# Altium PCB G5_Adapted.PcbDoc (part 1 of 2)
Units mil, origin at the board's own origin, x right, y up, seen from the top; angles counter-clockwise.
Board outline 3665.01 x 3900.74 mil, 4 copper layers (Top Layer, Int1, Int2, Bottom Layer), stack 53.912 mil thick; 133 components, 90 nets, 479 pads, 177 vias.
Unrouted connection lines stored in the file: 1.
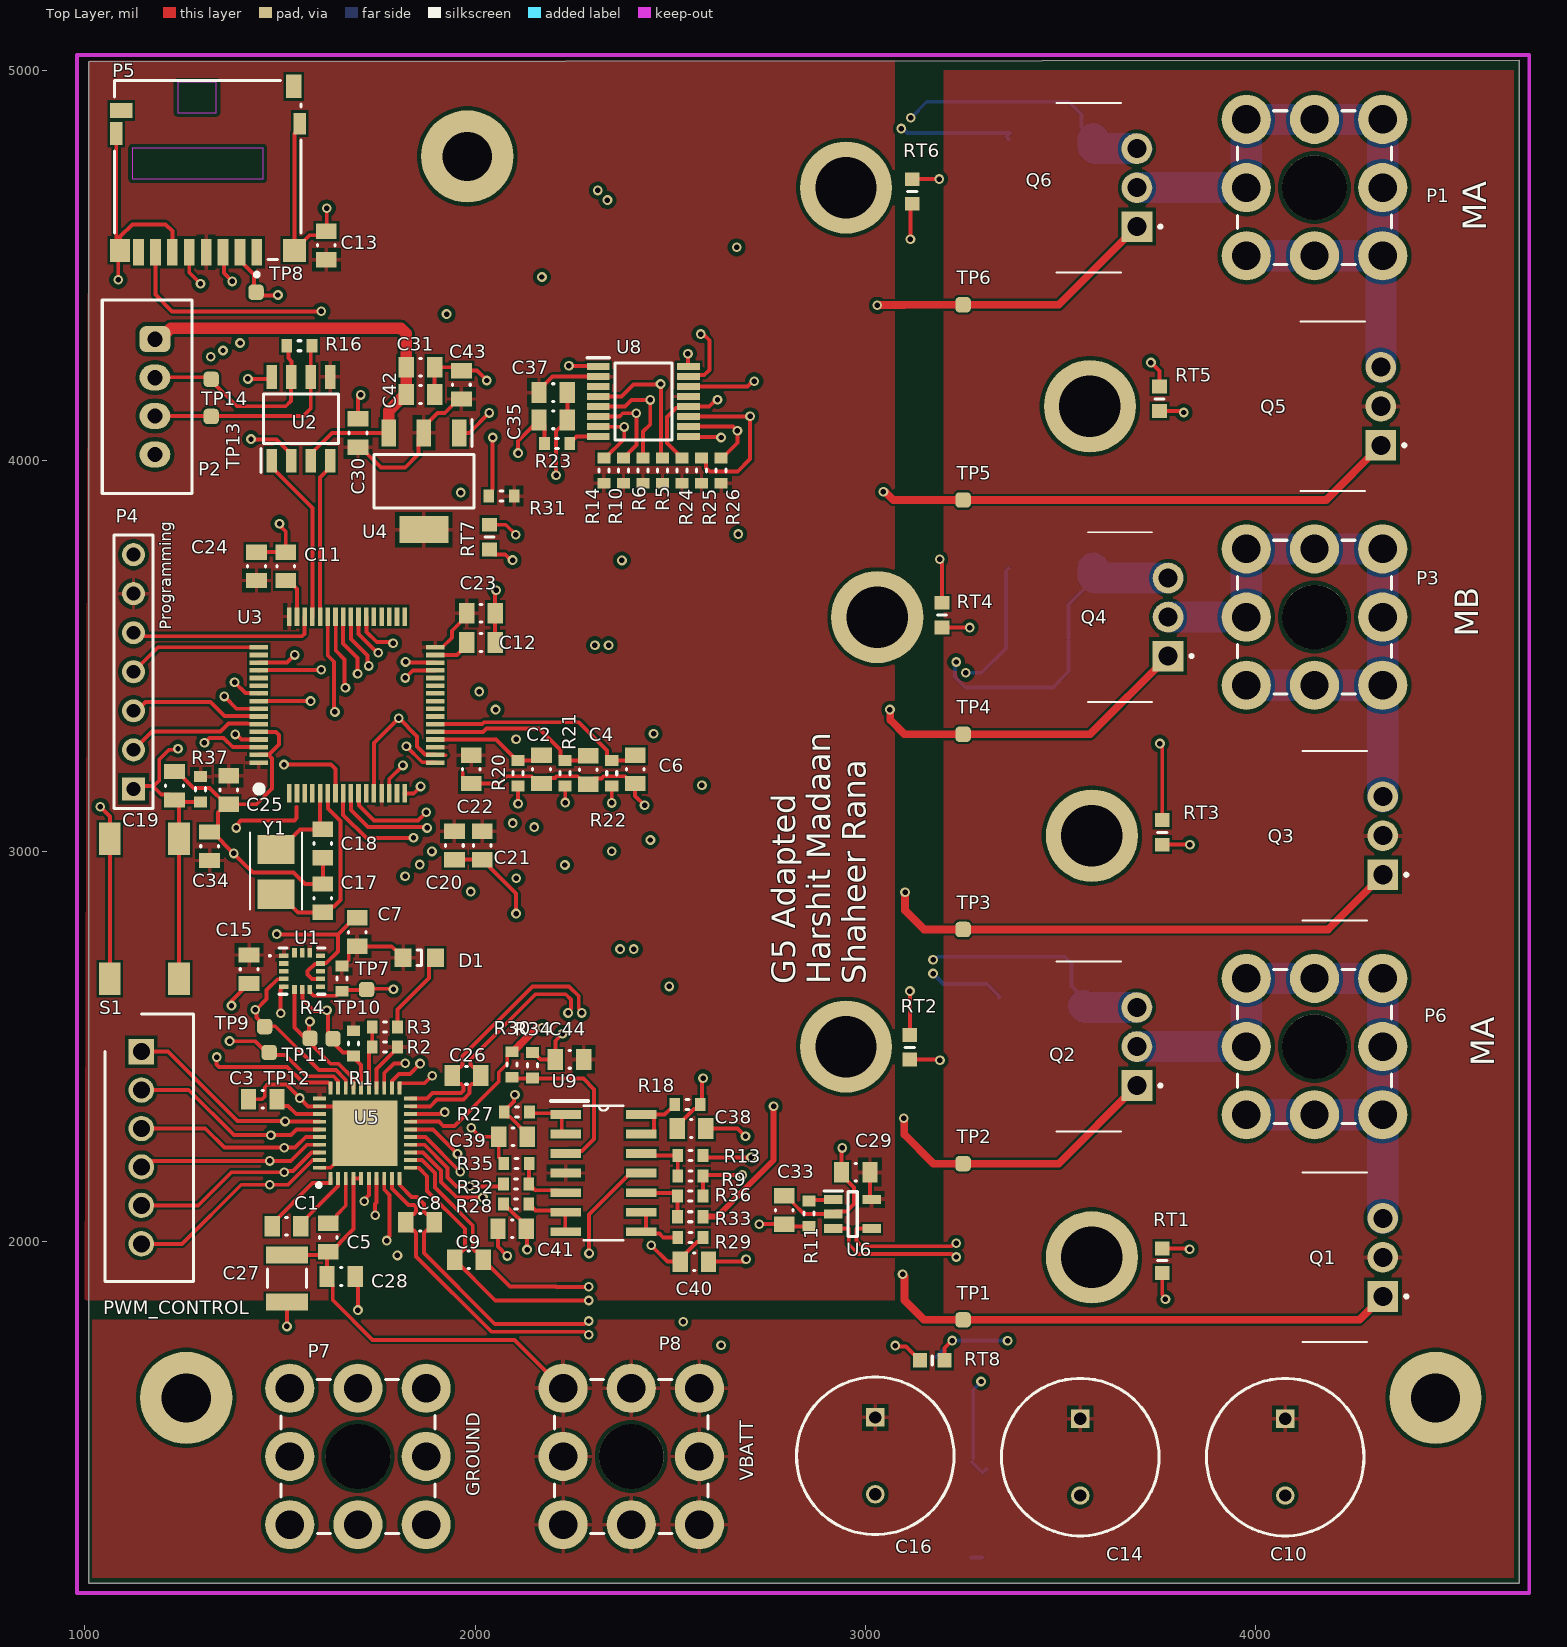
[diagram p0: Top Layer view]
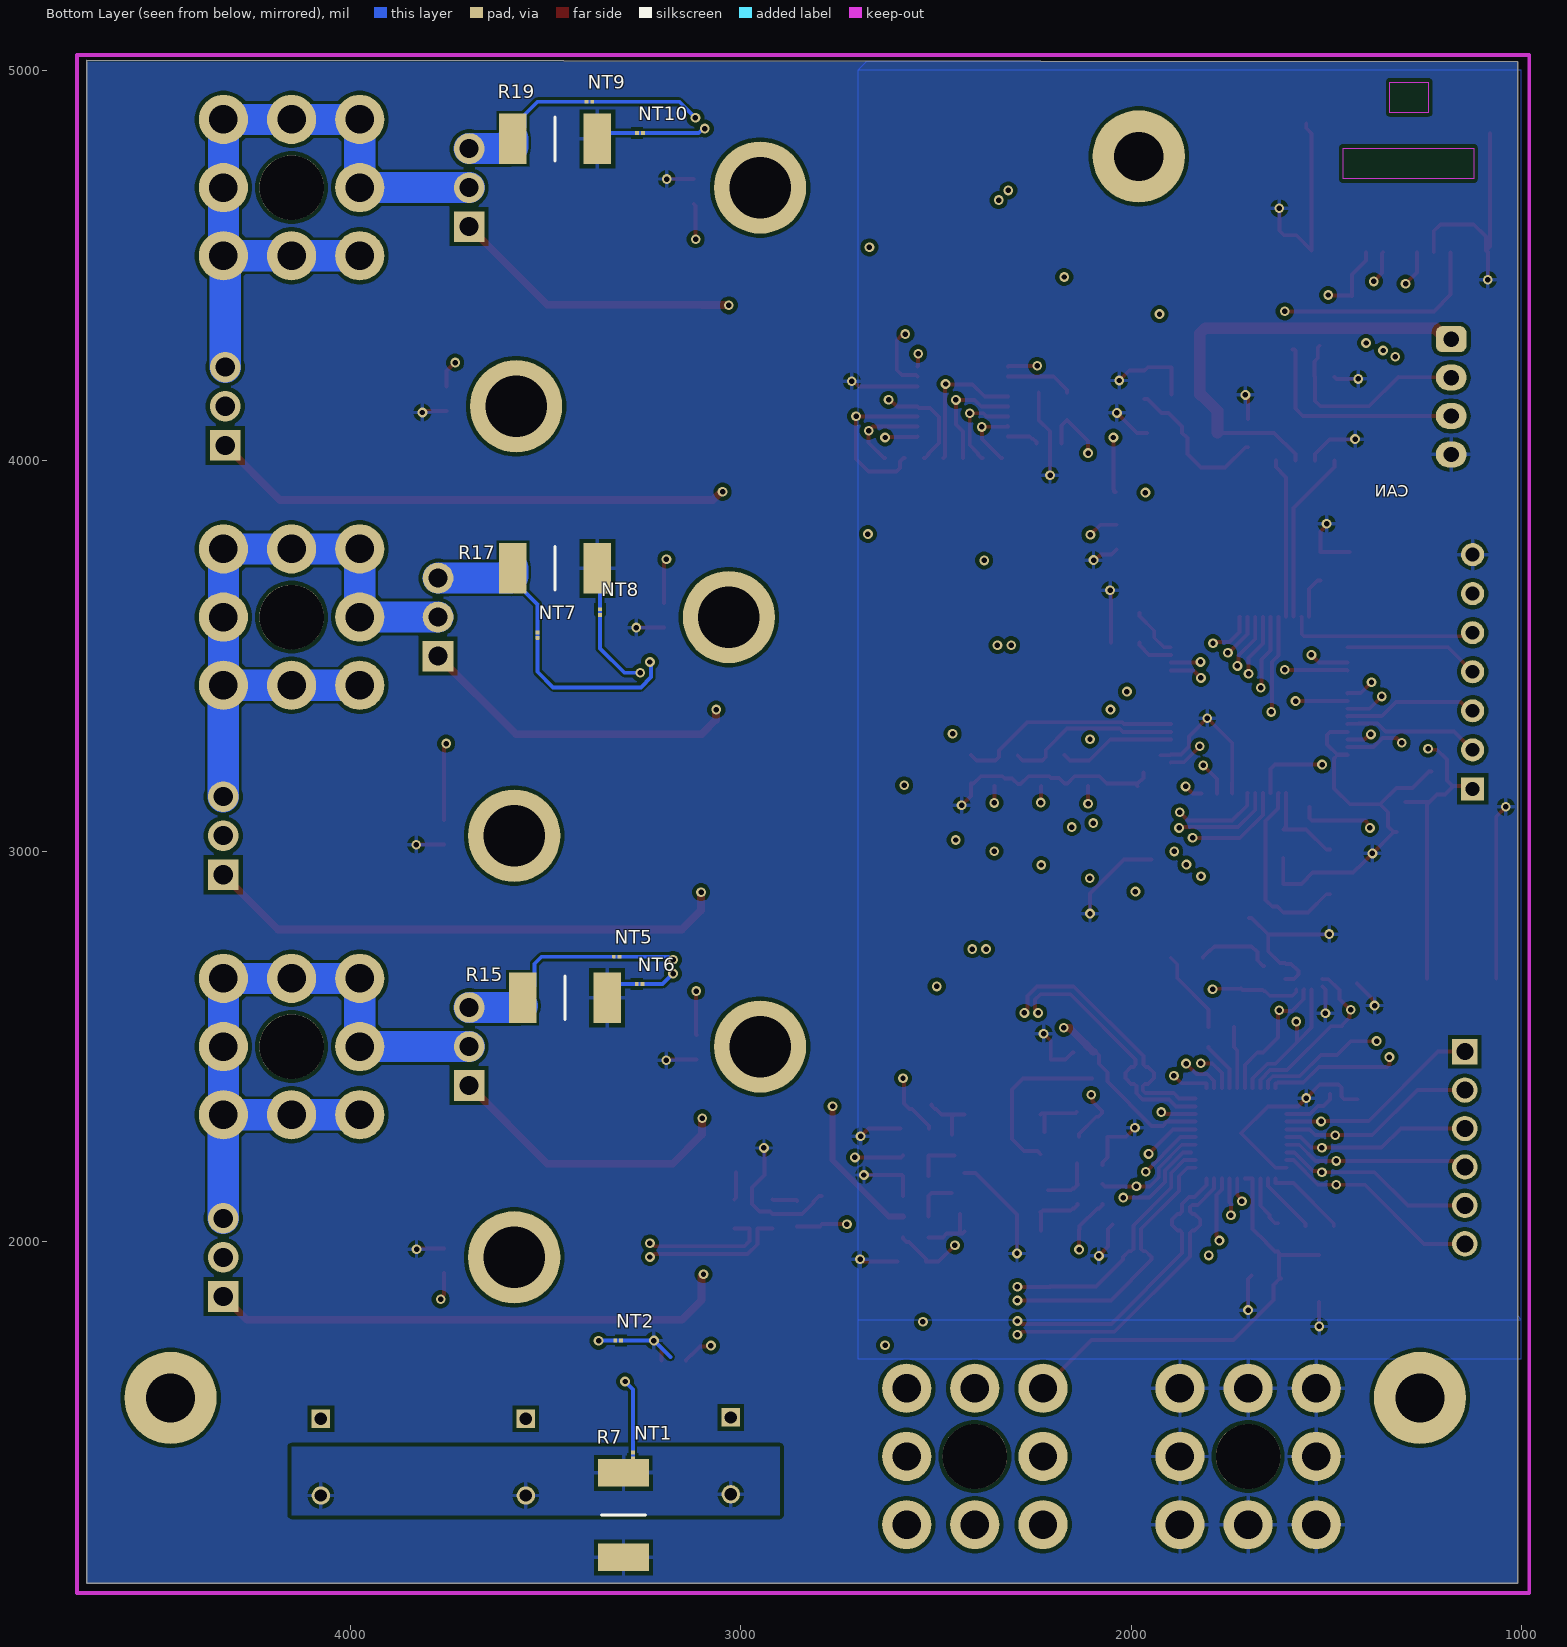
[diagram p1: Bottom Layer view, seen from below]
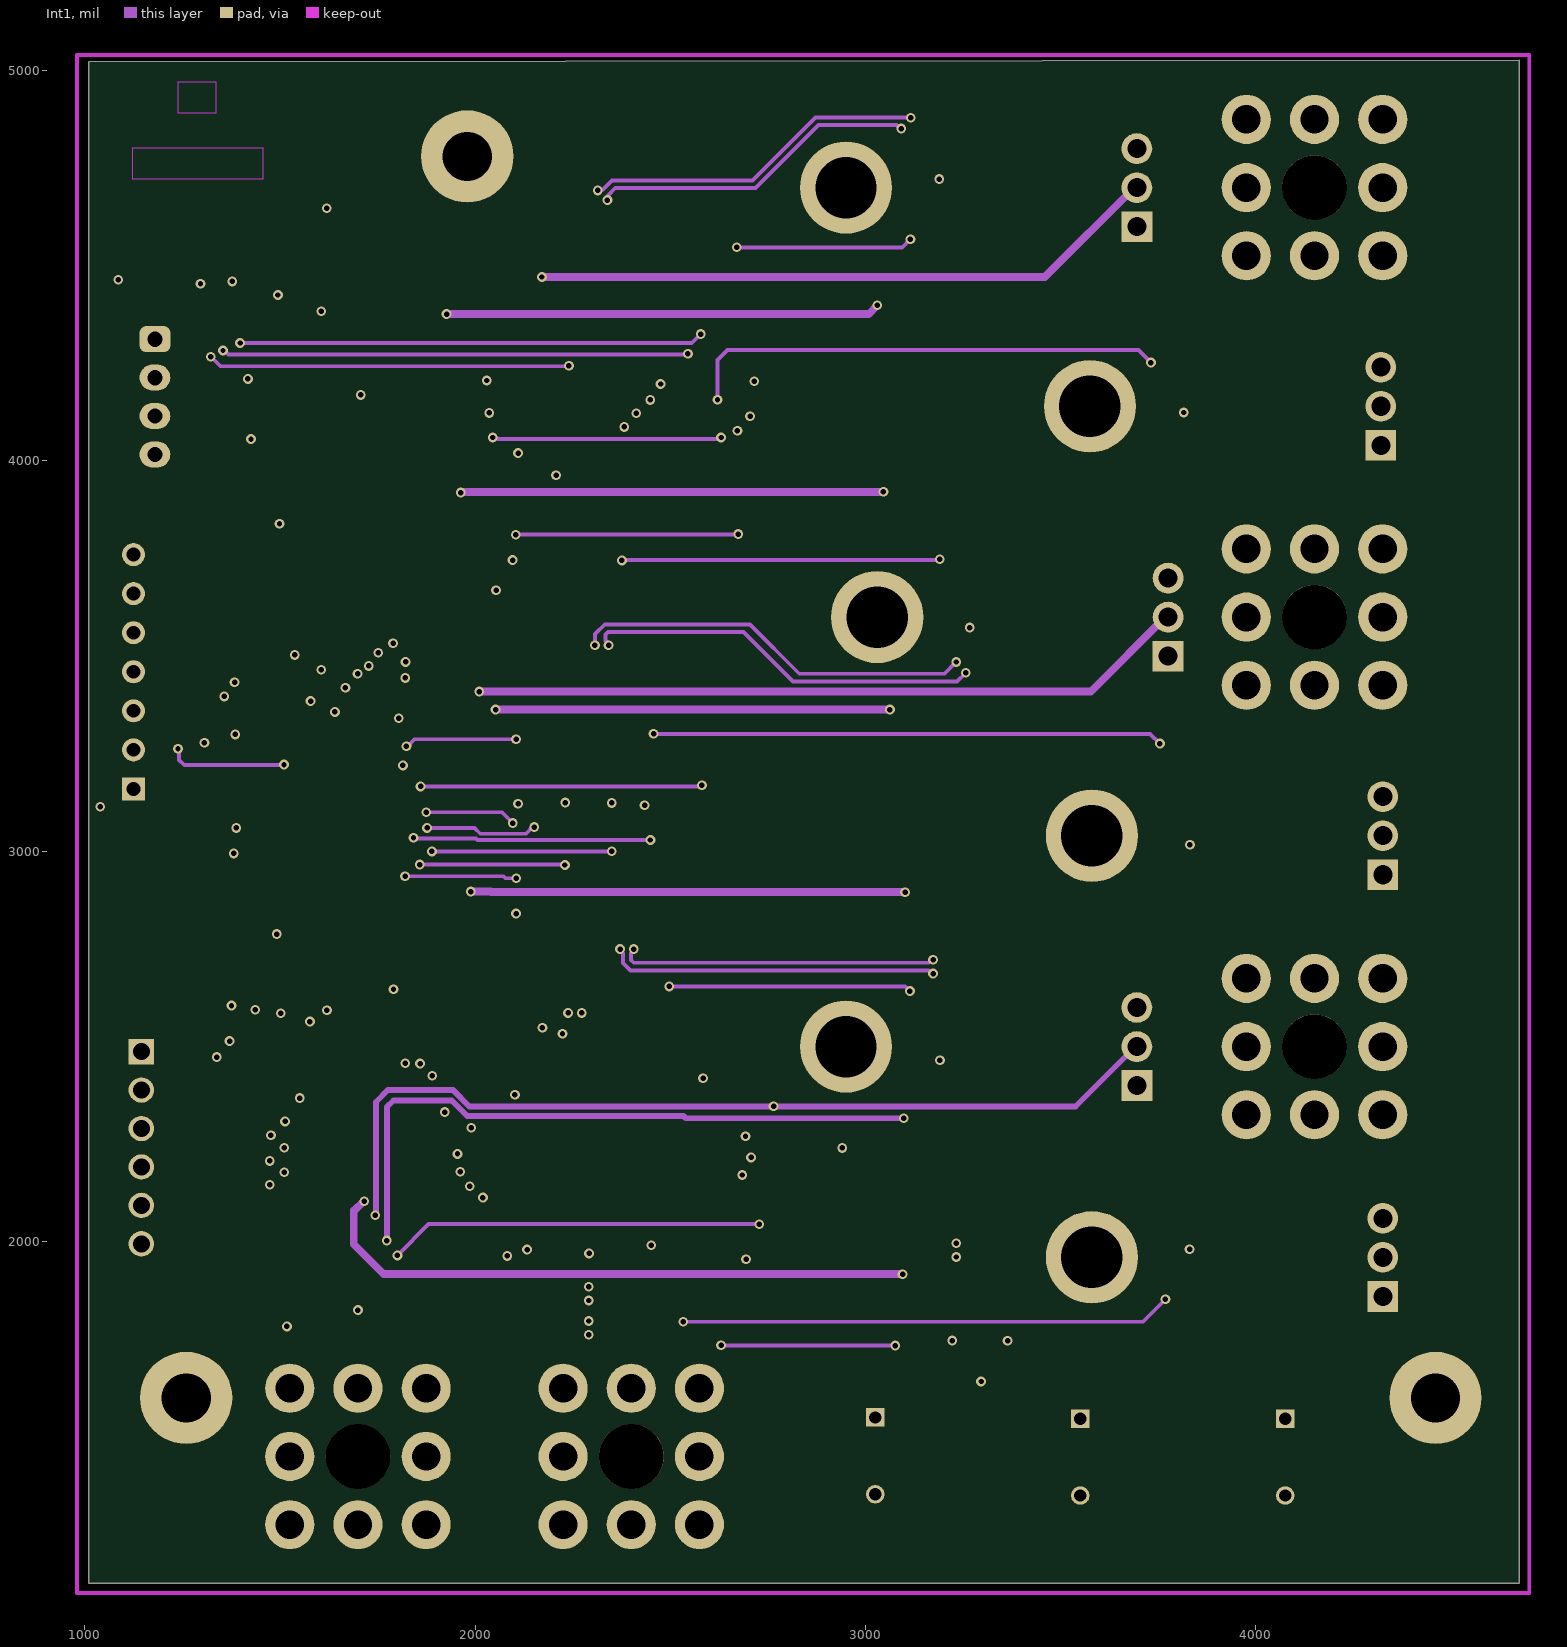
[diagram p2: Int1]
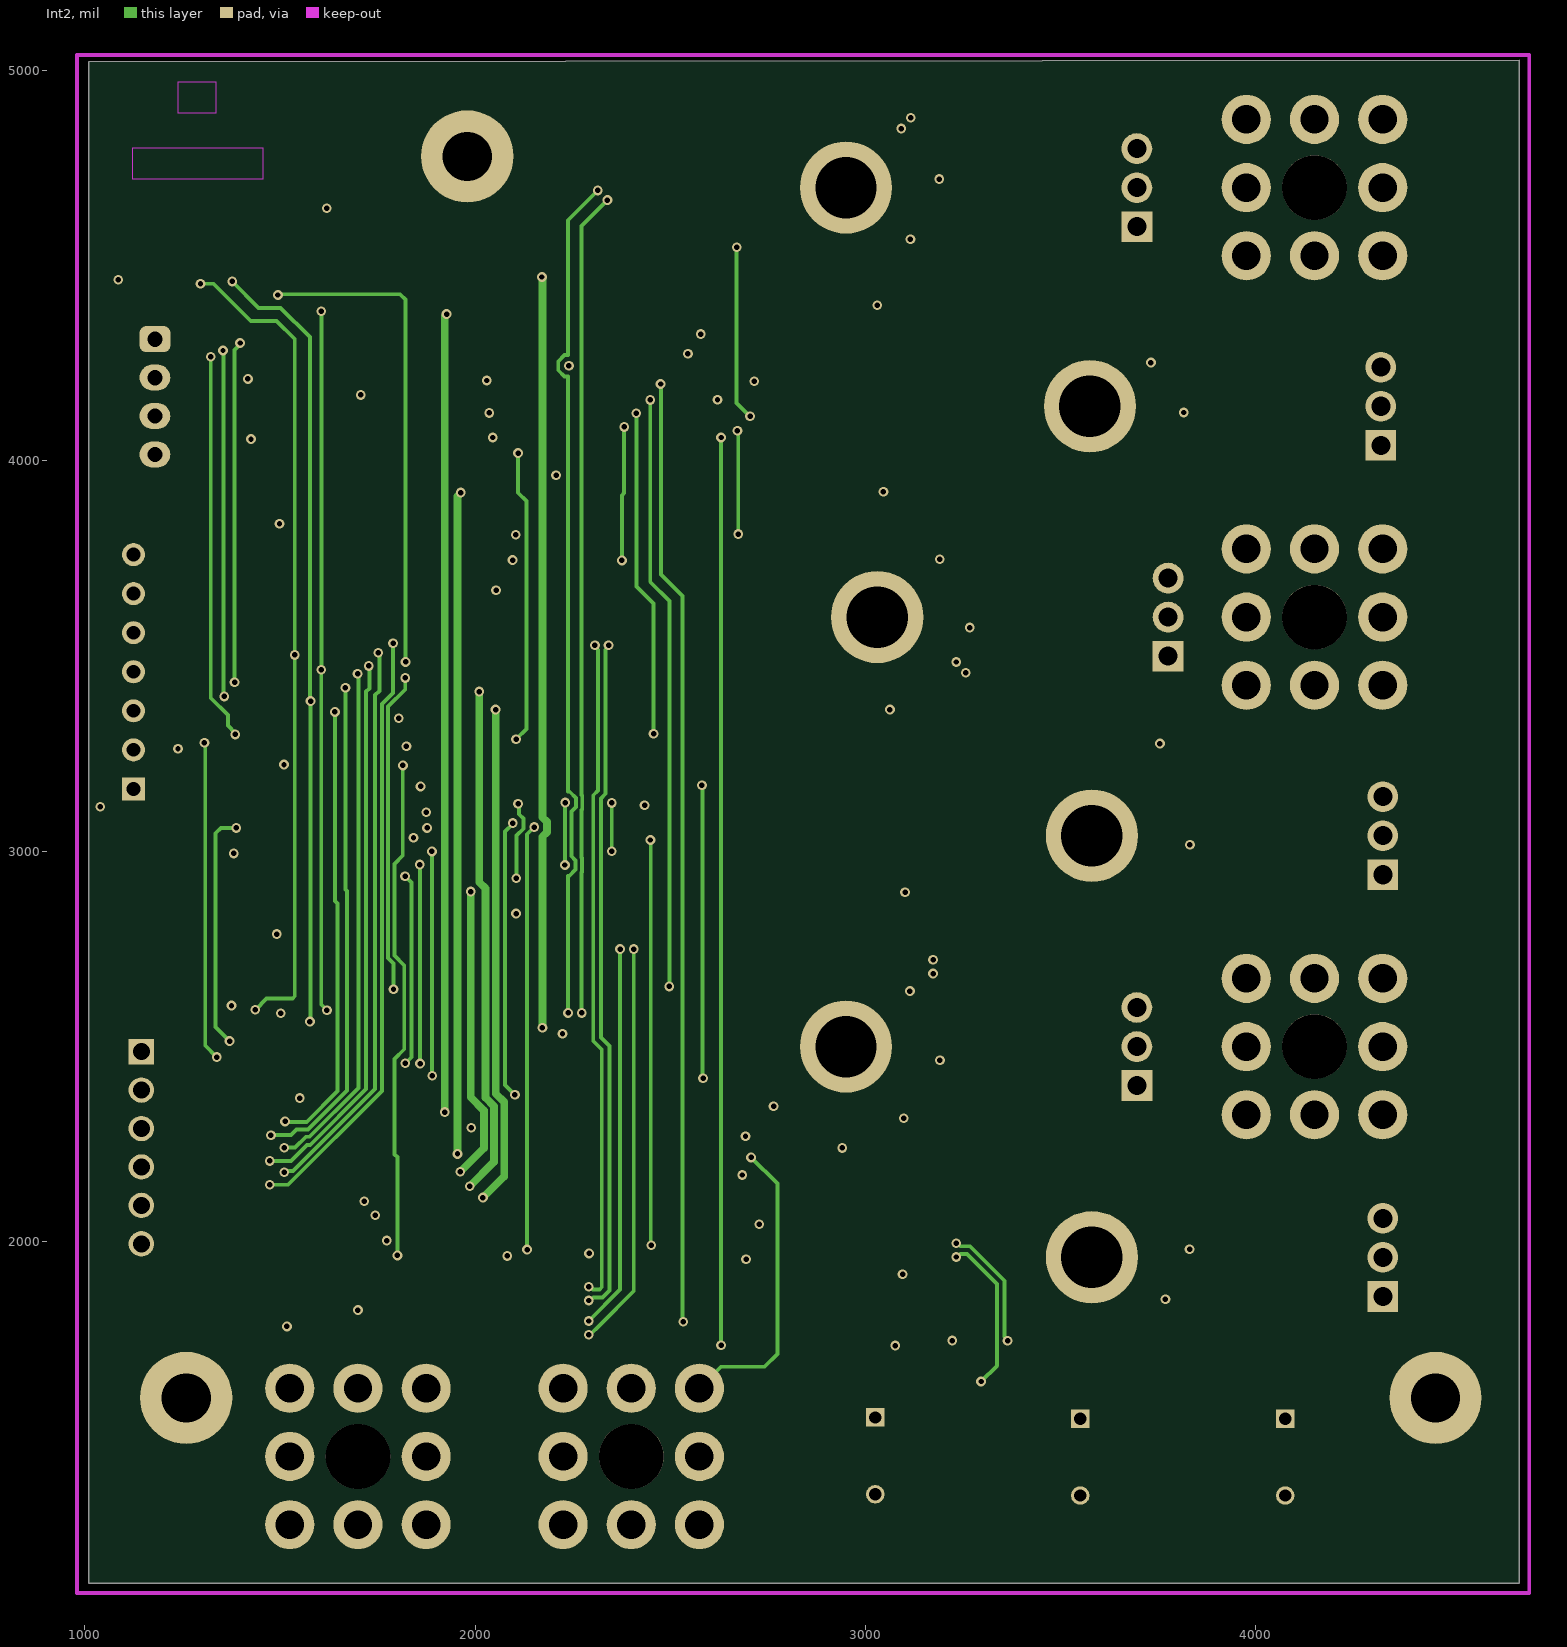
[diagram p3: Int2]
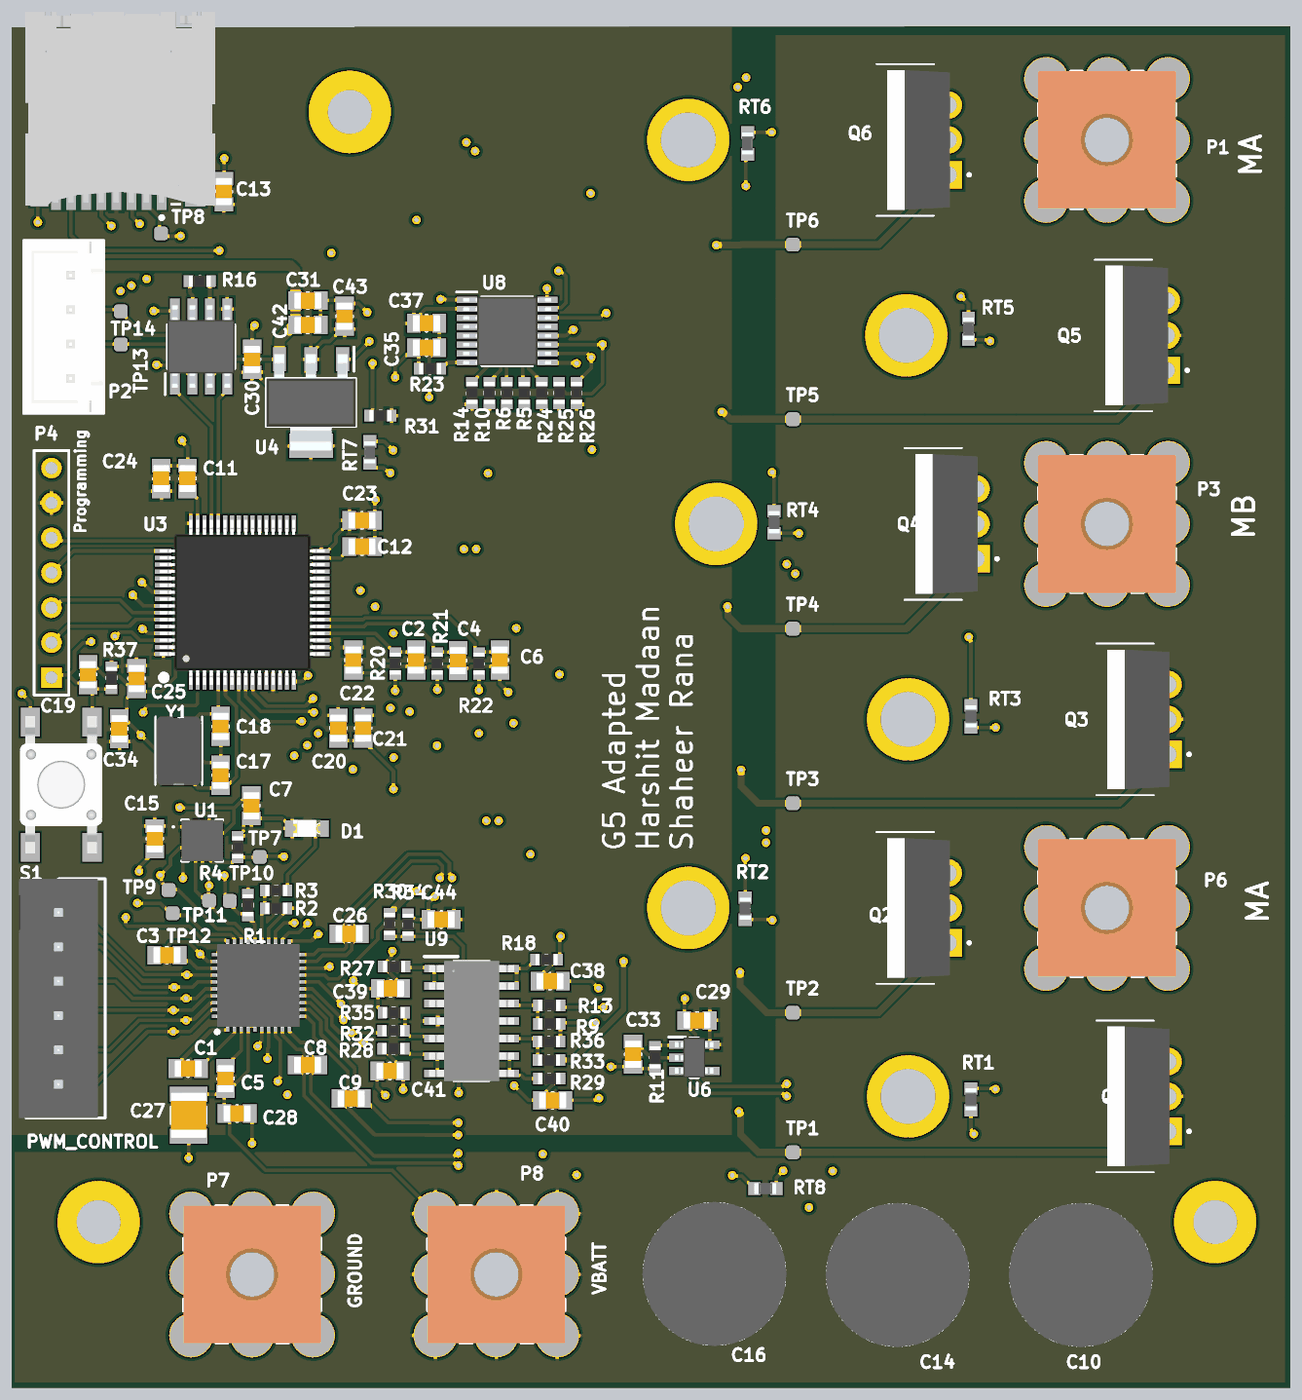
[diagram p5: 3D render of the assembled board from above, using the file's embedded part models]

## Layer stack, top to bottom
Top Solder: solder mask 1, SM-001, Dk 4
Top Layer: signal copper 1.378
Dielectric 1: prepreg 5.1, PP-017, Dk 4.3
Dielectric 2: prepreg 5.1, PP-017, Dk 4.3
Int1: signal copper 1.378
Dielectric 3: core 28, Core-039, Dk 4.8
Int2: signal copper 1.378
Dielectric 4: prepreg 5.1, PP-017, Dk 4.3
Dielectric 5: prepreg 5.1, PP-017, Dk 4.3
Bottom Layer: signal copper 1.378
Bottom Solder: solder mask 1, SM-001, Dk 4

## Board outline
1010,5022.5 1010,1125 4675,1125 4675,5025.74

## Design rules (kind name [scope] priority, off if disabled: settings)
Clearance Poly_rule_VBATT [InNamedPolygon('VBATT')] p1: gap=30 ignorepadtopadclearanceinfootprint=FALSE except(0: Arc-Hole Track-Hole SMDPad-Hole THPad-Hole Via-Hole Fill-Hole Poly-Hole Region-Hole Text-Hole)
Clearance [All] p2: gap=10 ignorepadtopadclearanceinfootprint=FALSE except(0: Arc-Hole Track-Hole SMDPad-Hole THPad-Hole Via-Hole Fill-Hole Poly-Hole Region-Hole Text-Hole; 6: Arc-Arc Arc-Track Arc-SMDPad Arc-Fill Arc-Poly Arc-Region Track-Track Track-SMDPad Track-Fill Track-Poly Track-Region SMDPad-SMDPad SMDPad-Fill SMDPad-Poly SMDPad-Region)
DiffPairsRouting [All] p1: maxlimit=10 minlimit=6 mostfreqgap=10 toplayer_minwidth=10 toplayer_maxwidth=15 toplayer_prefwidth=10 midlayer1_minwidth=10 midlayer1_maxwidth=15 midlayer1_prefwidth=10 midlayer2_minwidth=10 midlayer2_maxwidth=15 midlayer2_prefwidth=10 bottomlayer_minwidth=10 bottomlayer_maxwidth=15 bottomlayer_prefwidth=10 maxuncoupledlength=500
PolygonConnect [All] p1: connectstyle=Relief reliefconductorwidth=10 reliefentries=4 polygonreliefangle="90 Angle" airgapwidth=10
RoutingVias [All] p1: holewidth=14 width=25 viastyle="Through Hole" minholewidth=14 minwidth=25 maxholewidth=56 maxwidth=100
SolderMaskExpansion [All] p1: expansion=4 istentingtop=FALSE
Width [All] p1: maxlimit=80 minlimit=10 preferedwidth=10 minimp=50.000000 maximp=50.000000 favimp=50.000000
29 further rules are at their usual default settings.

## Classes and differential pairs
component class Peripherals: C13 C15 C34 C35 C37 P5 R4 R5 R6 R10 R14 R23 R24 R25 R26 R31 RT1 RT2 RT3 RT4 RT5 RT6 RT7 RT8 U1 U8
component class Motor_driver: C1 C2 C3 C4 C5 C6 C7 C8 C9 C10 C14 C16 C26 C27 C28 C29 C33 C38 D1 NT1 NT2 NT5 NT6 NT7 NT8 NT9 NT10 Q1 Q2 Q3 Q4 Q5 Q6 R1 R2 R3 R7 R9 R11 R13 R15 R17 R18 R19 R20 R21 R22 TP1 TP2 TP3 TP4 TP5 TP6 U5 U6
component class MCU: C11 C12 C17 C18 C19 C20 C21 C22 C23 C24 C25 C30 C31 R16 R37 S1 U2 U3 Y1
component class Main: C39 C40 C41 C42 C43 C44 P1 P2 P3 P4 P6 P7 P8 R27 R28 R29 R30 R32 R33 R34 R35 R36 TP7 TP8 TP9 TP10 TP11 TP12 TP13 TP14 U4 U9
differential pair SC: +SC_P -SC_N
differential pair SB: +SB_P -SB_N
differential pair SA: +SA_P -SA_N
differential pair DC_A: +DC_A_P -DC_A_N

## Components (designator, comment, footprint, x,y, rotation, side; value= is the part's Value field where it differs from the comment)
C1 "100V" "0805 - Capacitor" 1517,2040 r0 top value=47nF
C2 "10V" "0805 - Capacitor" 2170,3210 r270 top value=2200pF
C3 "100V" "0805 - Capacitor" 1456,2365 r180 top value=1uF
C4 "10V" "0805 - Capacitor" 2290,3208.58 r270 top value=2200pF
C5 "100V" "0805 - Capacitor" 1624,2011 r270 top value=1uF
C6 "10V" "0805 - Capacitor" 2410,3210 r270 top value=2200pF
C7 "100V" "0805 - Capacitor" 1698,2793 r90 top value=0.1uF
C8 "10V" "0805 - Capacitor" 1859,2050 r180 top value=1000pF
C9 "10V" "0805 - Capacitor" 1984,1954 r0 top value=1000pF
C10 "100V" "Electrolytic Cap" 4075,1546.85 r270 top value=100uF
C11 "10V" "0805 - Capacitor" 1515,3730 r270 top value=2.2uF
C12 "10V" "0805 - Capacitor" 2015,3535 r0 top value=2.2uF
C13 "100V" "0805 - Capacitor" 1619,4552 r270 top value=0.1uF
C14 "100V" "Electrolytic Cap" 3550,1546.85 r270 top value=100uF
C15 "100V" "0805 - Capacitor" 1421,2698 r90 top value=10uF
C16 "100V" "Electrolytic Cap" 3025,1550 r270 top value=15uF
C17 "100V" "0805 - Capacitor" 1610,2880 r90 top value=28pF
C18 "100V" "0805 - Capacitor" 1610,3020 r270 top value=28pF
C19 "100V" "0805 - Capacitor" 1230,3168 r90 top value=0.1uF
C20 "10V" "0805 - Capacitor" 1947,3015 r270 top value=10nF
C21 "100V" "0805 - Capacitor" 2018,3015 r270 top value=1uF
C22 "100V" "0805 - Capacitor" 1990,3210 r270 top value=0.1uF
C23 "100V" "0805 - Capacitor" 2015,3610 r0 top value=0.1uF
C24 "100V" "0805 - Capacitor" 1440,3730 r90 top value=0.1uF
C25 "100V" "0805 - Capacitor" 1369,3157 r270 top value=0.1uF
C26 "10V" "0805 - Capacitor" 1978,2426 r0 top value=1000pF
C27 "100V" "1210 - Capacitor" 1518,1906 r90 top value=4.7uF
C28 "100V" "0805 - Capacitor" 1657,1911 r180 top value=0.1uF
C29 "100V" "0805 - Capacitor" 2975,2178 r180 top value=0.1uF
C30 "100V" "0805 - Capacitor" 1700,4071.42 r90 top value=0.1uF
C31 "100V" "0805 - Capacitor" 1860,4240 r0 top value=0.1uF
C33 "100V" "0805 - Capacitor" 2792,2081 r90 top value=0.1uF
C34 "100V" "0805 - Capacitor" 1320,3013 r270 top value=0.1uF
C35 "100V" "0805 - Capacitor" 2200,4105 r180 top value=0.1uF
C37 "100V" "0805 - Capacitor" 2200,4175 r0 top value=0.1uF
C38 "100V" "0805 - Capacitor" 2554,2290 r180 top value=47nF
C39 "100V" "0805 - Capacitor" 2097,2269 r0 top value=47nF
C40 "100V" "0805 - Capacitor" 2561.42,1949 r180 top value=47nF
C41 "100V" "0805 - Capacitor" 2095,2033 r0 top value=47nF
C42 "100V" "0805 - Capacitor" 1860,4170 r0 top value=10uF
C43 "100V" "0805 - Capacitor" 1965,4195 r90 top value=100uF
C44 "100V" "0805 - Capacitor" 2242,2467 r0 top value=0.1uF
D1 "150080SS75000" 0805_A 1856.93,2727.46 r180 top
NT1 "NetTie" "NET TIE" 3276,1460 r180 bottom net-tie
NT2 "NetTie" "NET TIE" 3321,1747 r90 bottom net-tie
NT5 "NetTie" "NET TIE" 3310,2730 r270 bottom net-tie
NT6 "NetTie" "NET TIE" 3251,2660 r270 bottom net-tie
NT7 "NetTie" "NET TIE" 3520,3546 r0 bottom net-tie
NT8 "NetTie" "NET TIE" 3360,3605 r0 bottom net-tie
NT9 "NetTie" "Net Tie" 3380,4920 r270 bottom net-tie
NT10 "NetTie" "NET TIE" 3250,4840 r270 bottom net-tie
P1 "M4x3mm" 74650094 4150,4700 r90 top
P2 "CAN" b4b-xh 1180,4311.85 r270 top
P3 "M4x3mm" 74650094 4150,3600 r90 top
P4 "PROGRAMMING" HDR1X7 1125,3160 r90 top
P5 "DM3D-SF" FP-DM3D-SF-MFG 1315,4745 r0 top
P6 "M4x3mm" 74650094 4150,2500 r90 top
P7 "M4x3mm" 74650094 1700,1450 r0 top
P8 "M4x3mm" 74650094 2400,1450 r0 top
Q1 "NMOS-2" TO254P1651X1067X470-3 4325.08,1860 r90 top
Q2 "NMOS-2" TO254P1651X1067X470-3 3695.08,2400 r90 top
Q3 "NMOS-2" TO254P1651X1067X470-3 4325.08,2940 r90 top
Q4 "NMOS-2" TO254P1651X1067X470-3 3775,3500 r90 top
Q5 "NMOS-2" TO254P1651X1067X470-3 4320,4040 r90 top
Q6 "NMOS-2" TO254P1651X1067X470-3 3695.08,4600 r90 top
R1 "10k" "0603 - Resistor" 1688,2508 r270 top
R2 "10k" "0603 - Resistor" 1769,2499 r180 top
R3 "330" "0603 - Resistor" 1769,2550 r180 top
R4 "10k" "0603 - Resistor" 1659,2674 r90 top
R5 "10k" "0603 - Resistor" 2480,3975 r90 top
R6 "10k" "0603 - Resistor" 2430,3975 r270 top
R7 "500u" RESC6430X66N 3300,1300 r90 bottom
R9 "2.2k" "0603 - Resistor" 2551.48,2168 r180 top
R10 "10k" "0603 - Resistor" 2380,3975 r270 top
R11 "100" "0603 - Resistor" 2855,2072 r270 top
R13 "50k" "0603 - Resistor" 2551.48,2221 r0 top
R14 "10k" "0603 - Resistor" 2330,3975 r270 top
R15 "500u" RESC6430X66N 3450,2625 r0 bottom
R16 "500m" "0603 - Resistor" 1550,4295 r180 top value=120
R17 "500u" RESC6430X66N 3475,3725 r0 bottom
R18 "500m" "0603 - Resistor" 2544,2352 r0 top
R19 "500u" RESC6430X66N 3475,4825 r0 bottom
R20 "56" "0603 - Resistor" 2110,3200 r90 top
R21 "56" "0603 - Resistor" 2230,3200 r90 top
R22 "56" "0603 - Resistor" 2350,3200 r90 top
R23 "100" "0603 - Resistor" 2210,4045 r180 top
R24 "10k" "0603 - Resistor" 2530,3975 r270 top
R25 "10k" "0603 - Resistor" 2580,3975 r270 top
R26 "10k" "0603 - Resistor" 2630,3975 r270 top
R27 "500m" "0603 - Resistor" 2107,2332 r180 top
R28 "500m" "0603 - Resistor" 2105,2097 r180 top
R29 "500m" "0603 - Resistor" 2551.48,2011 r0 top
R30 "50k" "0603 - Resistor" 2094,2454 r270 top
R31 "10k" "0603 - Resistor" 2067.52,3910 r0 top
R32 "50k" "0603 - Resistor" 2105,2148 r0 top
R33 "50k" "0603 - Resistor" 2551,2064 r180 top
R34 "2.2k" "0603 - Resistor" 2147,2452 r270 top
R35 "2.2k" "0603 - Resistor" 2106,2200 r0 top
R36 "2.2k" "0603 - Resistor" 2551,2117 r180 top
R37 "10k" "0603 - Resistor" 1297,3159 r270 top
RT1 "10k" ERT-J1VG103JA 3760,1951.5 r90 top
RT2 "10k" ERT-J1VG103JA 3113,2498 r270 top
RT3 "10k" ERT-J1VG103JA 3760,3048.5 r270 top
RT4 "10k" ERT-J1VG103JA 3196,3605 r270 top
RT5 "10k" ERT-J1VG103JA 3753,4159 r270 top
RT6 "10k" ERT-J1VG103JA 3120,4690 r90 top
RT7 "10k" ERT-J1VG103JA 2037,3805 r270 top
RT8 "10k" ERT-J1VG103JA 3171,1696 r0 top
S1 "Switch - Push Button" "6x6mm Switch" 1153,2853 r270 top
TP1 "Test Point" "Test Point" 3250,1800 r90 top
TP2 "Test Point" "Test Point" 3250,2200 r90 top
TP3 "Test Point" "Test Point" 3250,2800 r90 top
TP4 "Test Point" "Test Point" 3250,3300 r90 top
TP5 "Test Point" "Test Point" 3250,3900 r90 top
TP6 "Test Point" "Test Point" 3250,4400 r90 top
TP7 "Test Point" "Test Point" 1722,2646 r90 top
TP8 "Test Point" "Test Point" 1439,4432 r90 top
TP9 "Test Point" "Test Point" 1461,2551 r90 top
TP10 "Test Point" "Test Point" 1636,2520 r90 top
TP11 "Test Point" "Test Point" 1577,2521 r90 top
TP12 "Test Point" "Test Point" 1472.53,2484.67 r90 top
TP13 "Test Point" "Test Point" 1324,4114 r90 top
TP14 "Test Point" "Test Point" 1324,4209 r90 top
U1 "LIS3DHTR" LIS3DHTR 1557,2693 r0 top
U2 "" TJA1051T/3,118 1553.94,4107.91 r90 top
U3 "STM32F405RGT6" STM32F405RG 1671.85,3375 r0 top
U4 "TLV1117-33IDCYR" TLV1117 1868.94,3947.91 r270 top
U5 "DRV8323SRTAT" DRV8323SRTAT 1718,2278 r90 top
U6 "INA180" INA180 2967,2071 r0 top
U8 "TMUX1208PWR" SOP65P640X120-16N 2431.06,4152.09 r0 top
U9 "LM324AMX/NOPB" LM324AMX/NOPB 2329,2176 r0 top
Y1 "ABM3-16.000MHZ-B2-T" ABM3-16.000MHZ-B2-T 1490,2950 r90 top
? "PWM_CONTROL" B6B-XH-A(LF)(SN) 1145,2486.85 r270 top

## Footprints (in the part's own frame and the unit in brackets; to place one, negate y for a bottom-side part, rotate by r counter-clockwise, add the part's x,y. Pads: shape width x height; smd on the part's side, far side on the other; paste and mask are expansions set on the pad)
"6x6mm Switch" [mm]
  rect 2.1x1.4 smd: 1(-4.55,2.25) 1(4.55,2.25) 2(-4.55,-2.25) 2(4.55,-2.25)
  body extent -5,-3 5,3, height 5.12
"0603 - Resistor" [mm] "0603 Chip Resistor - IPC Medium Density"
  rect 0.7x0.85 smd: 1(-0.825,0) 2(0.825,0)
  silkscreen extent -0.1,-0.33 0.1,0.33, body extent -0.8,-0.4 0.8,0.4, height 0.45
"0805 - Capacitor" [mm] "0805 Chip Capacitor - IPC Medium Density"
  rect 1x1.35 smd: 1(-0.925,0) 2(0.925,0)
  silkscreen extent -0.05,-0.58 0.05,0.58, body extent -1,-0.6 1,0.6, height 1.2
0805_A [mm] "Chip LED, 2-Leads, Body 2.0x1.3mm, IPC Medium Density"
  rect 1.1x1.2 smd: 1(-1.05,0) 2(1.05,0)
  silkscreen extent -0.15,-0.5 0.15,0.5, body extent -1,-0.62 1,0.63, height 0.68
"1210 - Capacitor" [mm] "1210 Chip Capacitor - IPC Medium Density"
  rect 1.1x2.75 smd: 1(-1.525,0) 2(1.525,0)
  silkscreen extent -0.6,-1.27 0.6,1.28, body extent -1.65,-1.3 1.65,1.3, height 1.6
74650094 [mm] "REDCUBE THR with internal thread, M4x3mm, through"
  round 3.2 hole 1.85: 1(-4.435,-4.435) 1(-4.435,0) 1(-4.435,4.435) 1(0,4.435) 1(0,-4.435) 1(4.435,-4.435) 1(4.435,0) 1(4.435,4.435)
  round 4.2 hole 4.2 unplated: MH1(0,0)
  silkscreen extent -5,-5 5,5, body extent -5,-5 5,5, height 3.5
ABM3-16.000MHZ-B2-T [mm]
  rect 1.9x2.4 smd: 1(-1.524,0) 2(1.397,0)
  silkscreen extent -2.5,-1.7 2.5,1.7, body extent -2.5,-1.65 2.5,1.65, height 1.3
b4b-xh [mm] "JST 4-Pin"
  rrect50% 1.7x2 hole 1: 1(0,0)
  oval 1.7x2 hole 1: 2(2.5,0) 3(5,0) 4(7.5,0)
  silkscreen extent -2.54,-3.43 10.03,2.41, body extent -2.45,-3.4 9.95,2.35, height 7
B6B-XH-A(LF)(SN) [mm]
  rect 1.65x1.65 hole 1.1: 1(0,0)
  round 1.65 hole 1.1: 2(2.5,0) 3(5,0) 4(7.5,0) 5(10,0) 6(12.5,0)
  silkscreen extent -2.45,-2.35 14.95,3.4, body extent -2.45,-2.88 14.95,2.88, height 7
DRV8323SRTAT [mm]
  rect 0.85x0.25 smd: 1(-2.95,2.25) 2(-2.95,1.75) 3(-2.95,1.25) 4(-2.95,0.75) 5(-2.95,0.25) 6(-2.95,-0.25) 7(-2.95,-0.75) 8(-2.95,-1.25) 9(-2.95,-1.75) 10(-2.95,-2.25) 21(2.95,-2.25) 22(2.95,-1.75) 23(2.95,-1.25) 24(2.95,-0.75) 25(2.95,-0.25) 26(2.95,0.25) 27(2.95,0.75) 28(2.95,1.25) 29(2.95,1.75) 30(2.95,2.25)
  rect 0.25x0.85 smd: 11(-2.25,-2.95) 12(-1.75,-2.95) 13(-1.25,-2.95) 14(-0.75,-2.95) 15(-0.25,-2.95) 16(0.25,-2.95) 17(0.75,-2.95) 18(1.25,-2.95) 19(1.75,-2.95) 20(2.25,-2.95) 31(2.25,2.95) 32(1.75,2.95) 33(1.25,2.95) 34(0.75,2.95) 35(0.25,2.95) 36(-0.25,2.95) 37(-0.75,2.95) 38(-1.25,2.95) 39(-1.75,2.95) 40(-2.25,2.95)
  rect 4.25x4.25 smd: 41(0,0)
  silkscreen extent -3.5,2.87 -3.25,3.12, body extent -3.05,-3.05 3.05,3.05, height 0.8
"Electrolytic Cap" [mm]
  rect 1.2x1.2 hole 0.8: 1(0,0)
  round 1.2 hole 0.8: 2(5,0)
  silkscreen extent -2.62,-5.13 7.62,5.13, body extent -2.75,-5.25 7.75,5.25, height 22
ERT-J1VG103JA [mm]
  rect 0.9x0.95 smd: 1(-0.8,0) 2(0.8,0)
  silkscreen extent 0,-0.3 0,0.3, body extent -0.8,-0.4 0.8,0.4, height 0.9
FP-DM3D-SF-MFG [mm]
  rect 0.7x1.75 smd paste+0 mask+0: 1(3.2,-5.35) 2(2.1,-5.35) 3(1,-5.35) 4(-0.1,-5.35) 5(-1.2,-5.35) 6(-2.3,-5.35) 7(-3.4,-5.35) 8(-4.5,-5.35)
  rect 1x1.55 smd paste+0 mask+0: 9(5.6,5.45)
  rect 1.45x1 smd paste+0 mask+0: 10(-5.625,3.875)
  rect 0.8x1.4 smd paste+0 mask+0: 11(6,3.025)
  rect 0.8x1.5 smd paste+0 mask+0: 12(-5.95,2.375)
  rect 1.3x1.5 smd paste+0 mask+0: 13(-5.7,-5.225)
  rect 1.5x1.5 smd paste+0 mask+0: 14(5.65,-5.225)
  Keep-Out Layer region: -1.95,3.725 0.55,3.725 0.55,5.725 -1.95,5.725
  Keep-Out Layer region: -4.9,-0.575 3.6,-0.575 3.6,1.425 -4.9,1.425
  silkscreen extent -6.07,-6.92 6.07,5.82, body extent -6.45,-6.32 6.5,6.32, height 0.25
HDR1X7 [mm] "Connector; Header; 7 Position"
  rect 1.5x1.5 hole 0.9: 1(0,0)
  round 1.5 hole 0.9: 2(2.54,0) 3(5.08,0) 4(7.62,0) 5(10.16,0) 6(12.7,0) 7(15.24,0)
  silkscreen extent -1.27,-1.27 16.51,1.27
INA180 [mm]
  rect 1.2x0.6 smd: 1(-1.25,0.95) 2(-1.25,0) 3(-1.25,-0.95) 4(1.25,-0.95) 5(1.25,0.95)
  silkscreen extent -1.85,-1.45 0.3,1.5, body extent -1.4,-1.45 1.4,1.45, height 1.45
LIS3DHTR [mm]
  rect 0.6x0.3 smd: 1(-1.2,1) 2(-1.2,0.5) 3(-1.2,0) 4(-1.2,-0.5) 5(-1.2,-1) 9(1.2,-1) 10(1.2,-0.5) 11(1.2,0) 12(1.2,0.5) 13(1.2,1)
  rect 0.3x0.6 smd: 6(-0.5,-1.2) 7(0,-1.2) 8(0.5,-1.2) 14(0.5,1.2) 15(0,1.2) 16(-0.5,1.2)
  silkscreen extent -2.16,-1.5 1.5,1.5, body extent -1.5,-1.5 1.5,1.5, height 1.1
LM324AMX/NOPB [mil] "Gen Purp 4Ch Opamp"
  rect 78x22 smd: 1(-97,150) 2(-97,100) 3(-97,50) 4(-97,0) 5(-97,-50) 6(-97,-100) 7(-97,-150) 8(97,-150) 9(97,-100) 10(97,-50) 11(97,0) 12(97,50) 13(97,100) 14(97,150)
  silkscreen extent -135,-172 51,185, body extent -122,-172 122,172, height 69
"NET TIE" [mil] "General Net TIe"
  rect 10x10 smd mask+0: 1(0,0) 2(0,-15)
  Top Layer lines w10: 0,-15 0,0
"Net Tie" [mil] "General Net TIe"
  rect 10x10 smd mask+0: 1(0,0) 2(0,-15)
  Top Layer lines w10: 0,0 0,-15
RESC6430X66N [mm]
  rect 1.8x3.3 smd: 1(-2.75,0) 2(2.75,0)
  silkscreen extent 0,-1.43 0,1.43, body extent -3.17,-1.53 3.18,1.53, height 0.66
SOP65P640X120-16N [mm]
  rect 1.475x0.45 smd: 1(-2.938,2.275) 2(-2.938,1.625) 3(-2.938,0.975) 4(-2.938,0.325) 5(-2.938,-0.325) 6(-2.938,-0.975) 7(-2.938,-1.625) 8(-2.938,-2.275) 9(2.938,-2.275) 10(2.938,-1.625) 11(2.938,-0.975) 12(2.938,-0.325) 13(2.938,0.325) 14(2.938,0.975) 15(2.938,1.625) 16(2.938,2.275)
  silkscreen extent -3.67,-2.5 1.85,2.85, body extent -3.2,-2.5 3.2,2.5, height 1.2
STM32F405RG [mm]
  rect 0.3x1.2 smd: 1(-3.75,-5.75) 2(-3.25,-5.75) 3(-2.75,-5.75) 4(-2.25,-5.75) 5(-1.75,-5.75) 6(-1.25,-5.75) 7(-0.75,-5.75) 8(-0.25,-5.75) 9(0.25,-5.75) 10(0.75,-5.75) 11(1.25,-5.75) 12(1.75,-5.75) 13(2.25,-5.75) 14(2.75,-5.75) 15(3.25,-5.75) 16(3.75,-5.75) 33(3.75,5.75) 34(3.25,5.75) 35(2.75,5.75) 36(2.25,5.75) 37(1.75,5.75) 38(1.25,5.75) 39(0.75,5.75) 40(0.25,5.75) 41(-0.25,5.75) 42(-0.75,5.75) 43(-1.25,5.75) 44(-1.75,5.75) 45(-2.25,5.75) 46(-2.75,5.75) 47(-3.25,5.75) 48(-3.75,5.75)
  rect 1.2x0.3 smd: 17(5.75,-3.75) 18(5.75,-3.25) 19(5.75,-2.75) 20(5.75,-2.25) 21(5.75,-1.75) 22(5.75,-1.25) 23(5.75,-0.75) 24(5.75,-0.25) 25(5.75,0.25) 26(5.75,0.75) 27(5.75,1.25) 28(5.75,1.75) 29(5.75,2.25) 30(5.75,2.75) 31(5.75,3.25) 32(5.75,3.75) 49(-5.75,3.75) 50(-5.75,3.25) 51(-5.75,2.75) 52(-5.75,2.25) 53(-5.75,1.75) 54(-5.75,1.25) 55(-5.75,0.75) 56(-5.75,0.25) 57(-5.75,-0.25) 58(-5.75,-0.75) 59(-5.75,-1.25) 60(-5.75,-1.75) 61(-5.75,-2.25) 62(-5.75,-2.75) 63(-5.75,-3.25) 64(-5.75,-3.75)
  silkscreen extent -5.79,-5.54 -5.64,-5.39, body extent -6,-6 6,6, height 1.5
"Test Point" [mm] "Test Point"
  rrect50% 1x1 smd: 0(0,0)
TJA1051T/3,118 [mm] "SOIC127P600X175-8N"
  rect 1.55x0.7 smd: 1(-2.725,1.905) 2(-2.725,0.635) 3(-2.725,-0.635) 4(-2.725,-1.905) 5(2.725,-1.905) 6(2.725,-0.635) 7(2.725,0.635) 8(2.725,1.905)
  silkscreen extent -3.5,-2.45 1.6,2.61, body extent -3,-2.45 3,2.45, height 1.75
TLV1117 [mm] "SOT230P700X180-4N"
  rect 1.75x0.95 smd: 1(-3.15,2.3) 2(-3.15,0) 3(-3.15,-2.3)
  rect 1.75x3.2 smd: 2(3.15,0)
  silkscreen extent -4.03,-3.25 1.75,3.25, body extent -3.5,-3.25 3.5,3.25, height 1.8
TO254P1651X1067X470-3 [mm]
  rect 2x2 hole 1.24: 1(0,0)
  round 2 hole 1.24: 2(2.54,0) 3(5.08,0)
  round 6 hole 4: 4.1(2.54,18.925)
  silkscreen extent -2.98,-1.62 8.06,5.22, body extent -2.54,-0.12 7.62,4.43, height 19.65

## Part data
C1 C7 C13 C15 C17 C18 C19 C22 C23 C24 C25 C28 C29 C30 C31 C33 C34 C35 C37 C38 C39 C40 C41 C42 C43 C44: library part "Capacitor - Nonpolarized", "CL21B104KCFNNNE, MULTILAYER CERAMIC CAPACITORS MLCC - SMD/SMT 100NF 100V 0805 ROHS"
C2 C3 C4 C5 C6 C8 C9 C21 C26 C27: library part "Capacitor - Nonpolarized", "TDK C2012X7S2A105KT000N, 1UF ±10% 100V X7S 0805 MULTILAYER CERAMIC CAPACITORS MLCC - SMD/SMT ROHS"
C10 C14: library part "Cap Pol3", "100ZLH100MEFC10X20, Aluminum Electrolytic Capacitors Radial, Can - 10000 Hrs @ 105°C, 100UF 20% 100V", LatestRevisionDate=29-May-2009, LatestRevisionNote="IPC-7351 Footprint Added.", PackageDescription="Chip Capacitor", PackageReference=C0805, Published=8-Jun-2000, Publisher="Altium Limited"
C11 C12: library part "Capacitor - Nonpolarized", "Nonpolarized Capacitor"
C16: library part "Cap Pol3", "EEU-EE2V150, Aluminum Electrolytic Capacitors Radial, Can - 8000 Hrs @ 105°C, CAP ALUM 15UF 20% 350V RADIAL", LatestRevisionDate=29-May-2009, LatestRevisionNote="IPC-7351 Footprint Added.", PackageDescription="Chip Capacitor", PackageReference=C0805, Published=8-Jun-2000, Publisher="Altium Limited"
C20: library part "Capacitor - Nonpolarized", "C0805C103K8RAC7800. 10000pF ±10% 10V Ceramic Capacitor X7R 0805 (2012 Metric)"
D1: library part CMP-1426-00010-1, "SMD mono-color Chip LED, WL-SMCW, Super Red", Color="Super Red", Manufacturer="Wuerth Elektronik", ComponentLink1Description="Manufacturer URL", ComponentLink1URL=http://www.we-online.com, ComponentLink2Description=Datasheet, ComponentLink2URL=http://katalog.we-online.com/led/datasheet/150080SS75000.pdf, PackageReference=0805_A, PartNumber=150080SS75000
NT1 NT2 NT5 NT6 NT7 NT8 NT9 NT10: library part "Net Tie"
P1 P3 P6 P7 P8: library part 74650094R, "WP-THRBU REDCUBE THR internal through-hole thread, 10x10mm, M4x3mm, 8 pins, 85A", Operating Temperature="-55 to +150degC", Rated Current=85A, ComponentLink1Description=Manufacturer, ComponentLink1URL=http://www.we-online.de, ComponentLink2Description=Datasheet, ComponentLink2URL=https://katalog.we-online.com/em/datasheet/74650094R.pdf, Height=3.5mm, Material=Brass, Mounting Technology=SMT, Packaging="Tape and Reel", Part Number=74650094R, Pin Number=8, Published Date="September 2019", Publisher="Wurth Elektronik", Size=10x10mm, Surface=Tin, Thread=M4, Thread Length=3mm
P2: library part "Header 4", "Header, 4-Pin", LatestRevisionDate=17-Jul-2002, LatestRevisionNote="Re-released for DXP Platform.", Publisher="Altium Limited"
P4: library part "Header 7", "Header, 7-Pin", LatestRevisionDate=17-Jul-2002, LatestRevisionNote="Re-released for DXP Platform.", Publisher="Altium Limited"
P5: library part CMP-2000-06166-2, "CONN MICRO SD CARD PUSH-PULL", Contact Resistance=100mR, Current Rating=500mA, Flammability Rating="UL94 V-0", Insulation Resistance=1GR, Max Operating Temperature=85°C, Max Voltage Rating (AC)=125V, Min Operating Temperature=-25°C, Package Quantity=1, Connector Type=Connector, Contact Material="Copper Alloy", Contact Plating=Gold, Depth=11.45mm, Gender=Female, Housing Material=Polymer, Lead Free="Lead Free", Length=11.95mm, Max Current Rating=500mA, Mount="Surface Mount", Number of Contacts=8, Number of Rows=1, Orientation="Right Angle", Packaging="Tape and Reel", Pitch=1.1mm, Radiation Hardening=No, REACH SVHC="No SVHC", Termination=Solder, Voltage Rating (AC)=125V, Width=11.95mm
Q1 Q2 Q3 Q4 Q5 Q6: "N-Channel Power MOSFET", ComponentLink1Description="Manufacturer Link", ComponentLink1URL=http://www.irf.com/, DatasheetVersion=PD-9.814, LatestRevisionDate=17-Jul-2002, LatestRevisionNote="Re-released for DXP Platform.", Note="Pin 2 is electrically connected to pin 4.", PackageDescription="TO, Thru-Hole, Vertical, Heatsink Mounted; 3 In-Line Leads; Pitch 2.54 mm", PackageReference=TO-220AB, PackageVersion=Feb-1997, Published=8-Jun-2000, Publisher="Altium Limited"
R1 R2 R3 R4 R5 R6 R7 R9 R10 R11 R13 R14 R15 R16 R17 R18 R19 R20 R21 R22 R23 R24 R25 R26 R27 R28 R29 R30 R31 R32 R33 R34 R35 R36 R37: library part Resistor, "Resistor"
RT1 RT2 RT3 RT4 RT5 RT6 RT7 RT8: library part ERT-J1VG103JA, "NTC Thermistor for Temperature Sensor, SMD 0603, 10kΩ", Case Code (Imperial)=0402, Case Code (Metric)=1005, Current Rating=140uA, Max Operating Temperature=125°C, Max Power Dissipation=100mW, Min Operating Temperature=-40°C, Package Quantity=10000, Resistance=47kR, Resistance Tolerance=1%, Case/Package=0402, Depth=0.5mm, Height=0.5mm, Lead Free="Lead Free", Length=1mm, Mount="Surface Mount", Number of Pins=2, Packaging="Tape and Reel", Power Rating=100mW, Radiation Hardening=No, RoHS Compliant=Yes, Series=NCP, Termination=SMD/SMT, Tolerance=1%
S1: "Push Button Switch"
U1: "Accelerometer", Manufacturer_Name=STMicroelectronics, Mouser Part Number=511-LIS3DHTR, Arrow Part Number=LIS3DHTR, Arrow Price/Stock=https://www.arrow.com/en/products/lis3dhtr/stmicroelectronics, Datasheet Link=http://www.st.com/content/ccc/resource/technical/document/datasheet/3c/ae/50/85/d6/b1/46/fe/CD00274221.pdf/files/CD00274221.pdf/jcr:content/translations/en.CD00274221.pdf, Height=1mm, Manufacturer_Part_Number=LIS3DHTR, Mouser Price/Stock=https://www.mouser.co.uk/ProductDetail/STMicroelectronics/LIS3DHTR/?qs=6la6oa3D8xzhXYax3cEo4w%3D%3D
U2: library part TJA1051T_3,118, "Integrated Circuit", Arrow Part Number=TJA1051T/3,118, Manufacturer_Name=NXP, Mouser Part Number=771-TJA1051T3118, Arrow Price/Stock=https://www.arrow.com/en/products/tja1051t3118/nxp-semiconductors, Datasheet Link=http://www.nxp.com/docs/en/data-sheet/TJA1051.pdf, Height=1.75mm, Manufacturer_Part_Number=TJA1051T/3,118, Mouser Price/Stock=https://www.mouser.co.uk/ProductDetail/NXP-Semiconductors/TJA1051T-3118?qs=O%2F7ihdSJpebv1PFlp05wnQ%3D%3D
U3: "ST 64-pin Micro", Manufacturer=ST, Manufacturer Part Number=STM32F405RG, Supplier Part Number=497-11767-ND, ComponentLink1Description=Datsheet, ComponentLink1URL=https://www.st.com/content/ccc/resource/technical/document/datasheet/ef/92/76/6d/bb/c2/4f/f7/DM00037051.pdf/files/DM00037051.pdf/jcr:content/translations/en.DM00037051.pdf, Supplier=Digikey
U4: "Linear Voltage Regulator IC 3.3V 800MA SOT223-4", Manufacturer="Texas Instruments", Supplier Part Number=296-21112-1-ND, Datasheet=http://www.ti.com/lit/ds/symlink/tlv1117.pdf?HQS=TI-null-null-digikeymode-df-pf-null-wwe&ts=1590668900314, Manufacturer Part Number=TLV1117-33IDCYR, Supplier=Digikey
U5: "Multiphase Motor Driver Power MOSFET SPI 40-WQFN _6x6_", Package="WQFN-40 Texas Instruments", Availability=Unavailable, MF="Texas Instruments", MP=DRV8323SRTAT, Price=None, SnapEDA_Link=https://www.snapeda.com/parts/DRV8323SRTAT/Texas%20Instruments/view-part/1675025/?ref=snap
U6: "0V to 26V Current Sense Amplifier", Manufacturer="Texas Instruments", Manufacturer Part Number=INA180A2IDBVR, Supplier Part Number=296-47653-1-ND, Datasheet=https://www.ti.com/lit/ds/symlink/ina180.pdf, Supplier=Digikey
U8: "Integrated Circuit", Manufacturer_Name="Texas Instruments", Mouser Part Number=595-TMUX1208PWR, Arrow Part Number=TMUX1208PWR, Arrow Price/Stock=https://www.arrow.com/en/products/tmux1208pwr/texas-instruments, Datasheet Link=http://www.ti.com/lit/gpn/tmux1208, Height=1.2mm, Manufacturer_Part_Number=TMUX1208PWR, Mouser Price/Stock=https://www.mouser.co.uk/ProductDetail/Texas-Instruments/TMUX1208PWR/?qs=lc2O%252BfHJPVbYdIGs2%2FdugA%3D%3D
U9: "Gen Purp 4Ch Opamp", Manufacturer=TI, Supplier Part Number=LM324AMX/NOPBCT-ND, ComponentLink1Description=Datasheet, ComponentLink1URL=https://www.ti.com/lit/ds/symlink/lm124-n.pdf?HQS=dis-dk-null-digikeymode-dsf-pf-null-wwe&ts=1616555832552, Manufacturer Part Number=LM324AMX/NOPB, Supplier=Digikey
Y1: "16MHz Â±20ppm Crystal 18pF 40 Ohms 2-SMD, No Lead", Package="SMD-2 Abracon", Digi-Key_Part_Number=535-9103-1-ND, Digi-Key_Purchase_URL=https://www.digikey.com/product-detail/en/abracon-llc/ABM3-16.000MHZ-B2-T/535-9103-1-ND/675620?utm_source=snapeda&utm_medium=aggregator&utm_campaign=symbol, MF=Abracon, MP=ABM3-16.000MHZ-B2-T, SnapEDA_Link=https://www.snapeda.com/parts/ABM3-16.000MHZ-B2-T/Abracon%20LLC/view-part/55266/?ref=snap
?: library part "Header 6", "Header, 6-Pin", LatestRevisionDate=17-Jul-2002, LatestRevisionNote="Re-released for DXP Platform.", Publisher="Altium Limited"

## Free pads (board coordinates)
  round 236.22 hole 125.98: 1(4460,1600) 2(1260,1600) 3(1980,4780)

## Via types
v1: diameter 25, hole 14, Top Layer to Bottom Layer, 177 vias

## Nets (pads, with @x,y where several pads share a name; then routed paths per layer and width w, separated by ;. In a path a pad name is that pad's centre, name@x,y a point inside that pad or via, vN(x,y) a via of type N, cw(c..) or ccw(c..) an arc to the next point about the centre after c; other vN are vias at no path point)
3.3V: C7.1 C13.2 C15.2 C20.1 C21.1 C22.1 C23.1 C24.1 C25.1 C29.1 C30.1 C34.2 C37.1 C43.1 C44.2 D1.2 P4.6 P5.4 R1.1 R2.1 R4.2 R5.1 R6.2 R10.2 R14.2 R24.2 R25.2 R26.2 R31.2 R37.1 U1.1 U1.14 U2.5 U3.13 U3.19 U3.32 U3.48 U3.64 U4.2 U5.24 U5.31 U6.5 U8.2 U8.13 U9.4 | length 1098
  Top Layer w10: R4.2@1659,2706.48 1661.95,2706.48 1676.43,2720.95 1676.43,2741.9 1691.11,2756.58 C7.1@1698,2756.58 1786.46,2756.58 1796.97,2746.08 1798.94,2746.08 1815.59,2729.43 D1.2@1815.59,2727.46 ; C30.1@1700,4035 1706.89,4035 1758.89,3983 1821,3983 1855.24,4017.24 1855.24,4058.23 U4.2@1868.94,4071.93 1868.94,4087.68 1903.9,4122.64 1922.17,4122.64 1958.11,4158.58 C43.1@1965,4158.58 ; U5.24@1747.53,2394.14 1747.53,2442.09 1801.48,2496.05 R2.1@1801.48,2499 ; U3.32@1898.23,3522.64 1915.94,3522.64 1940.37,3547.07 1940.37,3564.9 1978.58,3603.11 C23.1@1978.58,3610 ; C37.1@2163.58,4175 2163.58,4181.89 2197.76,4216.06 U8.2@2315.39,4216.06 ; C29.1@3011.42,2178 3011.42,2113.2 U6.5@3016.21,2108.4
5V: C31.1 C42.1 P2.1 U2.3 U4.3 | length 1202.5
  Top Layer w10: P2.1@1180,4311.85 P2.1@1192.08,4311.85 ; U2.3@1578.94,4000.63 1578.94,4017.36 1633.5,4071.93 U4.3@1778.39,4071.93 ; C42.1@1808.9,4148.43 1823.58,4163.11 C42.1@1823.58,4170
  Top Layer w30: P2.1@1192.08,4311.85 1220.23,4340 1810,4340 1823.58,4326.42 C31.1@1823.58,4240 C42.1@1823.58,4170 1820.12,4170 1778.61,4128.49 1778.61,4072.15 U4.3@1778.39,4071.93
ADC1: C33.1 R11.2 U3.14 | length 2463
  Top Layer w10: U3.14@1780.12,3148.62 1780.12,3185.12 v1(1815,3220) ; v1(2727.77,2045.09) 2791.5,2045.09 C33.1@2792,2044.58 2797.06,2039.52 R11.2@2855,2039.52
  Int1 w10: v1(1801,1965) 1881.09,2045.09 v1(2727.77,2045.09)
  Int2 w10: v1(1801,1965) 1801,2216.58 1793.84,2223.74 1793.84,2468.39 1818.5,2493.05 1818.5,2707.7 1793.21,2732.99 1793.21,2967.78 1814.72,2989.29 1814.72,3219.72 v1(1815,3220)
ADC3: C38.2 R18.2 U3.16 | length 1681.7
  Top Layer w10: U3.16@1819.49,3148.62 1842.79,3148.62 v1(1860.3,3166.13) ; C38.2@2517.58,2290 2517.58,2296.89 2560.96,2340.27 2567.7,2340.27 2581.13,2353.7 2581.13,2416.13 v1(2584,2419)
  Int1 w10: v1(1860.3,3166.13) 2578.13,3166.13 v1(2581,3169)
  Int2 w10: v1(2581,3169) 2582.5,3167.5 2582.5,2420.5 v1(2584,2419)
ADC4: C35.2 R23.2 U3.17 | length 1305.8
  Top Layer w10: v1(1824,3269) 1864.73,3228.27 1897.32,3228.27 U3.17@1898.23,3227.36 ; v1(2110,4020) 2110,4051.42 C35.2@2163.58,4105 2177.52,4091.06 R23.2@2177.52,4045
  Int1 w10: v1(1824,3269) 1826.89,3269 1844.89,3287 v1(2105,3287)
  Int2 w10: v1(2105,3287) 2131.5,3313.5 2131.5,3897.03 2110,3918.53 v1(2110,4020)
CAN_RX: U2.4 U3.44 | length 410.5
  Top Layer w10: U3.44@1602.95,3600.91 1602.95,3957.91 1628.94,3983.9 U2.4@1628.94,4000.63
CAN_TX: U2.1 U3.45 | length 442.9
  Top Layer w10: U2.1@1478.94,4000.63 1478.94,3983.9 1583.27,3879.57 U3.45@1583.27,3600.91
CANH: P2.3 R16.1 TP13.0 U2.6 | length 564.9
  Top Layer w10: P2.3@1180,4115 1310,4115 1325,4115 1560,4115 1578.94,4133.94 U2.6@1578.94,4215.2 1578.94,4283.27 1581.06,4285.39 R16.1@1586.83,4285.39
CANL: P2.2 R16.2 TP14.0 U2.7 | length 533.1
  Top Layer w10: P2.2@1180,4213.43 1180.79,4214.21 1314.21,4214.21 1315,4215 1390,4140 1515,4140 1528.94,4153.94 U2.7@1528.94,4215.2 1530,4216.26 1530,4255 1521.73,4263.27 1521.73,4290.79 R16.2@1517.52,4295
CS_ACC: R4.1 TP7.0 U1.8 U3.29 | length 1138.9
  Top Layer w10: U1.8@1576.68,2645.76 1576.68,2639.85 1586.54,2630 1644.53,2630 1656.05,2641.52 R4.1@1659,2641.52 1662.74,2645.26 1714.26,2645.26 1718,2649 1719,2648 1790,2648 v1(1791,2647) ; v1(1820.98,3444.25) 1840.31,3463.58 U3.29@1897.76,3463.58
  Int2 w10: v1(1791,2647) 1791,2712.57 1777.21,2726.36 1777.21,3370.58 1820.98,3414.35 v1(1820.98,3444.25)
CS_DRIVER: TP12.0 U3.2 U5.29 | length 1142.7
  Top Layer w10: v1(1371,2514) 1371.5,2513.5 1437.5,2513.5 1438,2513 1472.25,2478.75 1513.61,2478.75 1568.49,2423.87 1636.9,2423.87 1649.02,2411.75 1649.02,2394.22 U5.29@1649.1,2394.14 ; v1(1388,3060) 1388,3064.06 1393.75,3069.81 1393.75,3073.14 1399.61,3079 1537.14,3079 1543,3084.86 1543,3114
  Int2 w10: v1(1371,2514) 1335,2550 1335,3046.33 1348.67,3060 v1(1388,3060)
CS_SD: P5.2 TP8.0 U3.30 | length 1526.5
  Top Layer w10: P5.2@1397.68,4534.37 1397.68,4513.7 1434.06,4477.32 1434.06,4422.87 1435.13,4423.93 1493.93,4423.93 v1(1495,4425) ; v1(1822,3485) 1822.87,3484.13 1896.89,3484.13 U3.30@1897.76,3483.27
  Int2 w10: v1(1495,4425) 1497,4427 1808,4427 1822,4413 v1(1822,3485)
DC_A_N: NT2.1 U6.4 | length 698.3
  Top Layer w10: U6.4@3016.21,2033.6 2977.59,2033.6 2977,2033.01 2977,2001.77 2990.36,1988.41 3220.56,1988.41 3228.06,1995.91 v1(3232.11,1995.91)
  Int2 w10: v1(3232.11,1995.91) 3236.17,1995.91 3243.67,1988.41 3267.9,1988.41 3356.25,1900.05 3356.25,1757.81 3363.75,1750.31 v1(3363.75,1746.25)
  Bottom Layer w10: NT2.1@3321,1747 3363.01,1747 v1(3363.75,1746.25)
DC_A_P: NT1.1 U6.3 | length 963.3
  Top Layer w10: U6.3@2917.79,2033.6 2956.41,2033.6 2957,2033.01 2957,1993.48 2982.07,1968.41 3220.56,1968.41 3228.06,1960.91 v1(3232.11,1960.91)
  Int2 w10: v1(3232.11,1960.91) 3236.17,1960.91 3243.67,1968.41 3259.61,1968.41 3336.25,1891.77 3336.25,1682.25 v1(3296,1642)
  Bottom Layer w10: NT1.1@3276,1460 3276,1622 v1(3296,1642)
EN_DRIVER: U3.62 U5.30 | length 1313.6
  Top Layer w10: v1(1306.8,3278.28) 1308.44,3278.28 1320.16,3290 1356.26,3290 ; v1(1338,2473) 1338,2453.86 1343.86,2448 1518.61,2448 1558.74,2407.87 1623.56,2407.87 1625.56,2405.87 1629.34,2405.87 1629.42,2405.8 U5.30@1629.42,2394.14 ; 1356.45,3289.51 1379.22,3266.73 U3.62@1445.94,3266.73
  Int2 w10: v1(1306.8,3278.28) 1308.69,3276.39 1308.69,2502.31 v1(1338,2473)
GHA: Q1.1 TP1.0 U5.6 | length 2983.7
  Top Layer w10: v1(1715.97,2104) 1715.97,2108.06 1727.84,2119.93 U5.6@1727.84,2161.86
  Top Layer w20: v1(3095,1917) 3095,1915.65 3100,1910.65 3100,1850 3150,1800 TP1.0@3250,1800 4265.08,1800 Q1.1@4325.08,1860
  Int1 w20: v1(1715.97,2104) 1714.62,2104 1691.27,2080.65 1689,2080.65 1689,1994 1766,1917 v1(3095,1917) ; Q1.1@4310.95,1845.87 Q1.1@4325.08,1860
GHB: Q3.1 TP3.0 U5.15 | length 3383.7
  Top Layer w10: U5.15@1834.14,2268.16 1872.84,2268.16 v1(1962,2179)
  Top Layer w20: v1(3101.32,2895.4) 3101.32,2848.68 3150,2800 4185.08,2800 Q3.1@4325.08,2940
  Int1 w20: v1(1988.76,2897) 2039.82,2897 2041.26,2895.56 3101.16,2895.56 v1(3101.32,2895.4)
  Int2 w20: v1(1962,2179) 2022.5,2239.5 2022.5,2336.35 1988.76,2370.09 v1(1988.76,2897)
GHC: Q5.1 TP5.0 U5.16 | length 4279.2
  Top Layer w10: U5.16@1834.14,2287.84 1892.05,2287.84 1924.62,2255.27 v1(1954.95,2224.95) ; v1(3046,3921) v1@3050.06,3921 ; 3065.31,3905.74 3071.06,3900
  Top Layer w20: v1@3048.31,3921 3048.31,3920.04 3051.02,3920.04 3071.06,3900 4180,3900 Q5.1@4320,4040
  Int1 w10: v1(1963,3919) v1@1964,3920 ; v1@3045,3920 v1(3046,3921)
  Int1 w20: v1@1964,3920 v1@3045,3920
  Int2 w20: v1(1954.95,2224.95) 1954.95,3909.59 1963,3917.65 v1(1963,3919)
GLA: Q2.1 TP2.0 U5.8 | length 2611.6
  Top Layer w10: U5.8@1767.21,2161.86 1767.21,2133.79 1781,2120 1781,2014.06 1773.5,2006.56 v1(1773.5,2003)
  Top Layer w20: v1(3098,2316.35) 3098.96,2315.39 3098.96,2275 3173.96,2200 3495.08,2200 Q2.1@3695.08,2400
  Int1 w15: v1(1773.5,2003) 1774,2003.5 1774,2345 1791,2362 1940,2362 1980,2322 2534.08,2322 2539.73,2316.35 v1(3098,2316.35)
GLB: Q4.1 TP4.0 U5.13 | length 3367.8
  Top Layer w10: U5.13@1845.87,2228.79 1866.96,2228.79 1913,2182.75 1913,2153 1953,2113 v1(2020,2113)
  Top Layer w20: v1(3062.41,3363.18) 3063.36,3362.22 3063.36,3336.64 3100,3300 3575,3300 Q4.1@3775,3500
  Int1 w20: v1(2052.5,3363) 3062.23,3363 v1(3062.41,3363.18)
  Int2 w20: v1(2020,2113) 2074.5,2167.5 2074.5,2357.89 2053,2379.39 2053,3362.5 v1(2052.5,3363)
GLC: Q6.1 TP6.0 U5.18 | length 3997.6
  Top Layer w10: U5.18@1834.14,2327.21 1908.6,2327.21 1910.52,2329.13 1919.58,2329.13 v1(1922.45,2332)
  Top Layer w20: v1(3030.15,4398.42) 3030.94,4399.21 3099.21,4399.21 3100,4400 3375,4400 3495.08,4400 Q6.1@3695.08,4600
  Int1 w20: v1(1927,4376) 3008,4376 3030.42,4398.42 v1(3030.15,4398.42)
  Int2 w20: v1(1922.45,2332) 1922.45,4370.09 1927,4374.65 v1(1927,4376)